# EAGLE board sensor-board (EAGLE 6.4)
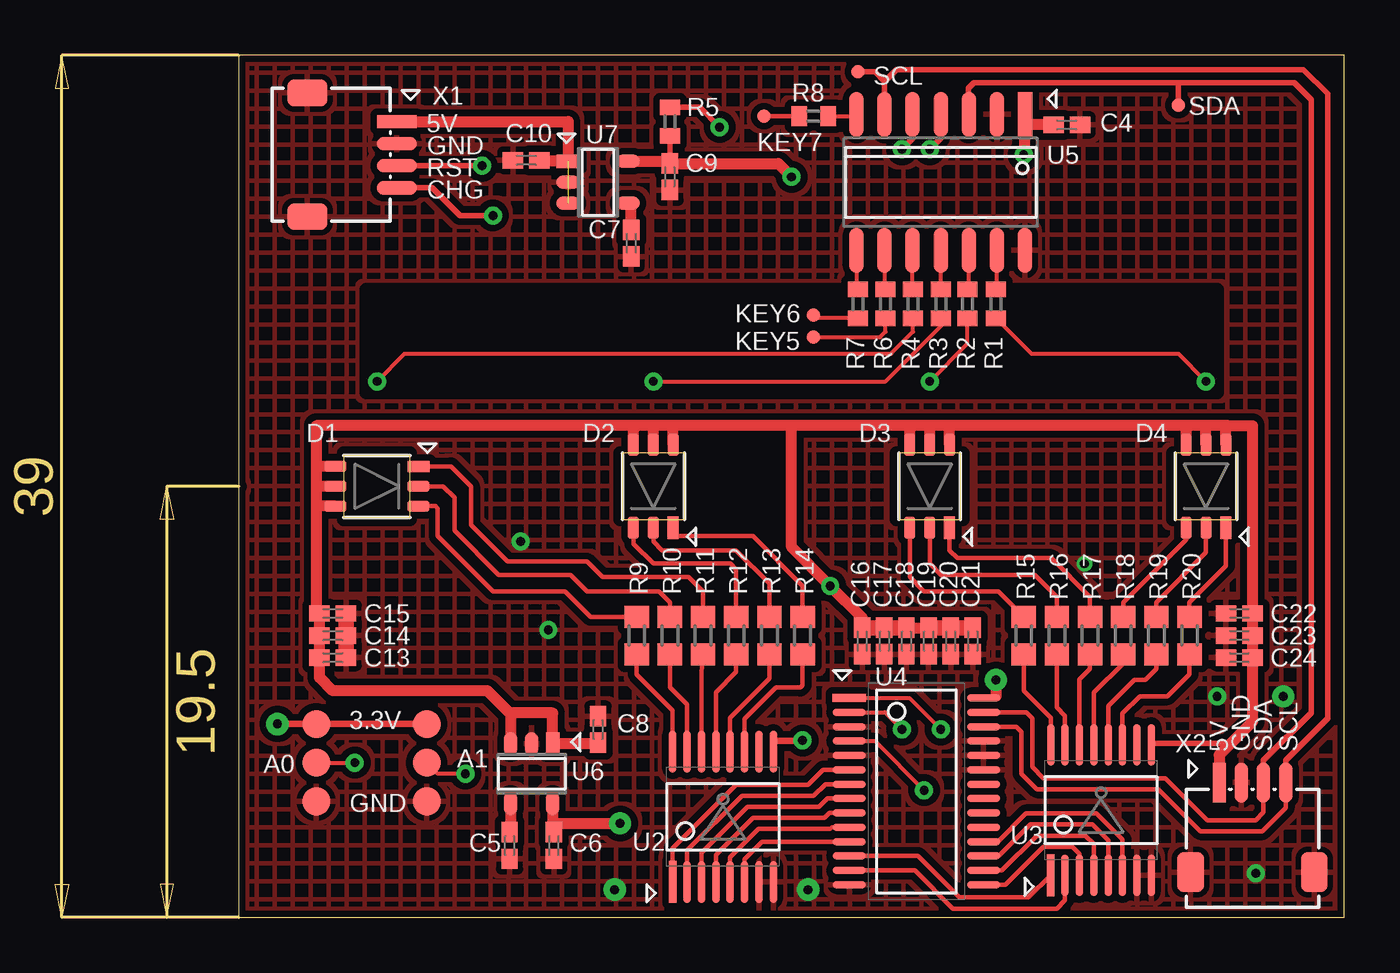
[diagram p0: board, top side]
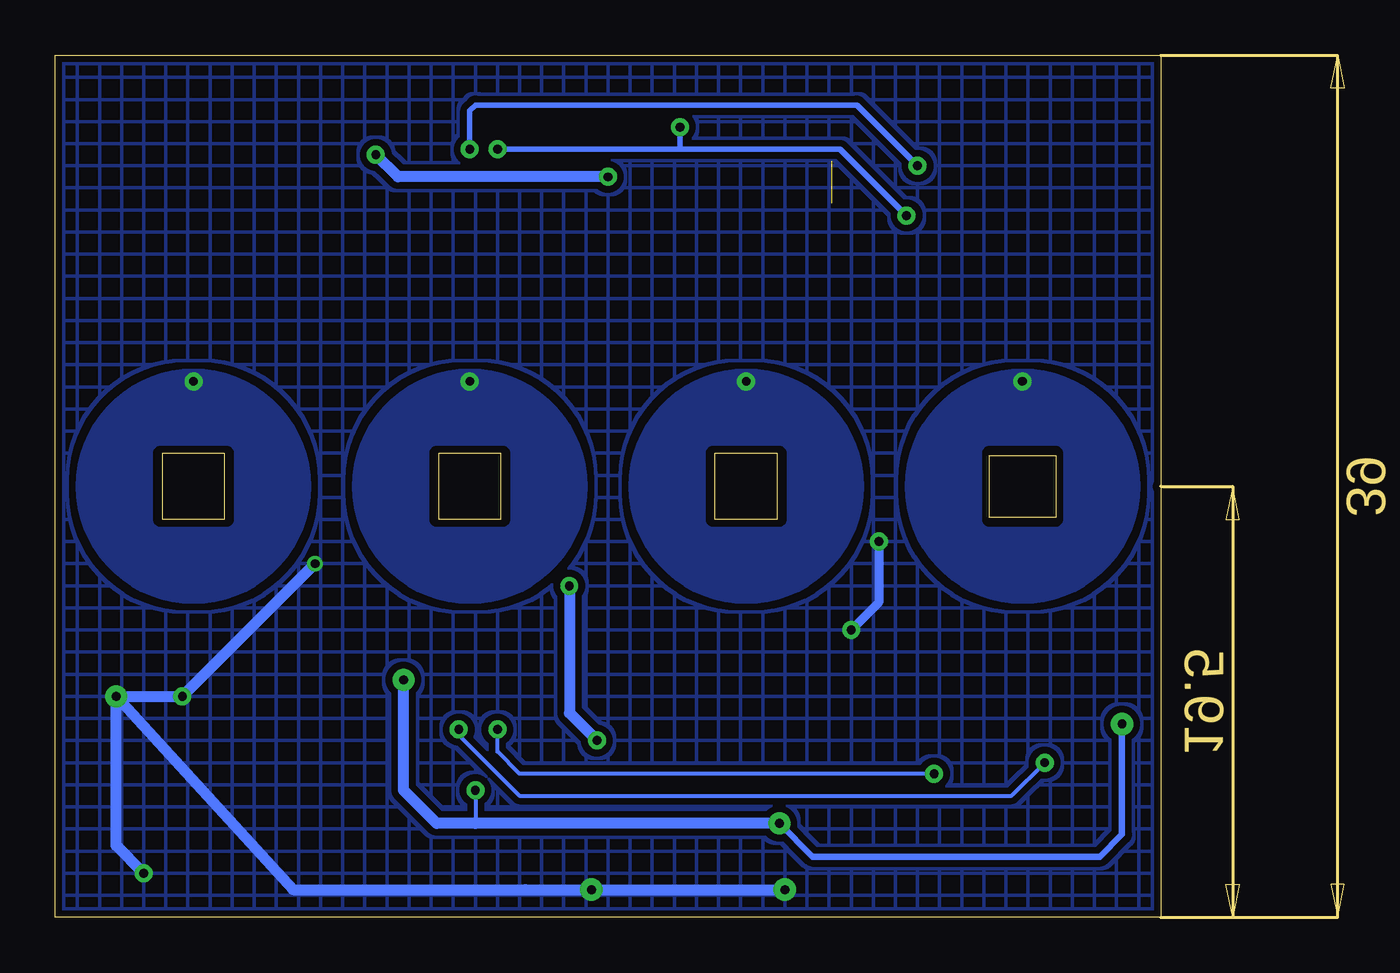
[diagram p1: board, bottom side, seen from below]

Size 50 x 39 mm. Coordinates in mm from the lower left corner, seen from the top.
Outline: 0,0 50,0 50,39 0,39 0,0
Copper layers (1*16): Top 0.035mm / dielectric 1.5mm / Bottom 0.035mm
Design rules "Fusion_eagle_rule_v1.1 *": minimum track width 6mil, minimum drill 12mil, track to track 6mil, track to pad 6mil, pad to pad 6mil, via to via 6mil, smd to smd 0mil, copper to edge 10mil, drill to drill 10mil, minimum pad ring 10mil, minimum via ring 6mil, stop-mask expansion 2mil, vias tented up to drill 100mil, thermal gap 10mil
tRestrict: area 4.8,18 to 7.8,21; area 17.2,18 to 20.2,21; area 29.8,18 to 32.8,21; area 42.2,18 to 45.2,21; area 5.8,23.8 to 44.2,28.4

## Footprints (pad centres in the part's own frame; a part is rotated, then mirrored left to right if it is on the bottom)
B1,27 = smd 1.27 x 1.27: TP 0,0
C0402K = smd 0.925 x 0.74: 1 -0.6,0; 2 0.6,0
ASMT-YTC2-0AA02-REV = smd 1 x 0.5: 1 -1.875,-0.9; 2 -1.875,0; 3 -1.875,0.9; 4 1.875,0.9; 5 1.875,0; 6 1.875,-0.9
TP06R = smd 0.6 x 0.6: TP 0,0
R0402 = smd 0.7 x 0.9: 1 -0.65,0; 2 0.65,0
R0603 = smd 1 x 1.1: 1 -0.85,0; 2 0.85,0
TSSOP-PW-R-PDSO-G16 = smd 1.9 x 0.35: 1 -2.95,2.275; 2 -2.95,1.625; 3 -2.95,0.975; 4 -2.95,0.325; 5 -2.95,-0.325; 6 -2.95,-0.975; 7 -2.95,-1.625; 8 -2.95,-2.275; 9 2.95,-2.275; 10 2.95,-1.625; 11 2.95,-0.975; 12 2.95,-0.325; 13 2.95,0.325; 14 2.95,0.975; 15 2.95,1.625; 16 2.95,2.275
SOT361-1 = smd 1.5 x 0.35: 1 -3.038,4.225; 2 -3.038,3.575; 3 -3.038,2.925; 4 -3.038,2.275; 5 -3.038,1.625; 6 -3.038,0.975; 7 -3.038,0.325; 8 -3.038,-0.325; 9 -3.038,-0.975; 10 -3.038,-1.625; 11 -3.038,-2.275; 12 -3.038,-2.925; 13 -3.038,-3.575; 14 -3.038,-4.225; 15 3.038,-4.225; 16 3.038,-3.575; 17 3.038,-2.925; 18 3.038,-2.275; 19 3.038,-1.625; 20 3.038,-0.975; 21 3.038,-0.325; 22 3.038,0.325; 23 3.038,0.975; 24 3.038,1.625; 25 3.038,2.275; 26 3.038,2.925; 27 3.038,3.575; 28 3.038,4.225
SO14 = smd 0.66 x 2.032: 1 -3.81,-3.073; 2 -2.54,-3.073; 3 -1.27,-3.073; 4 0,-3.073; 5 1.27,-3.073; 6 2.54,-3.073; 7 3.81,-3.073; 8 3.81,3.073; 9 2.54,3.073; 10 1.27,3.073; 11 0,3.073; 12 -1.27,3.073; 13 -2.54,3.073; 14 -3.81,3.073
SOT23-5 = smd 0.6 x 1.05: 1 -0.95,-1.35; 2 0,-1.35; 3 0.95,-1.35; 4 0.95,1.35; 5 -0.95,1.35
MOLEX-501953-0407 = smd 0.6 x 1.8: 1 -1.5,5.65; 2 -0.5,5.65; 3 0.5,5.65; 4 1.5,5.65 | smd 1.2 x 1.8: 5 -2.8,1.6; 6 2.8,1.6

## Placement (x,y rotation side)
3.3V  TPB1,27  [B1,27]  8.5,8.75 90 top
A0  TPB1,27  [B1,27]  3.5,7 90 top
A1  TPB1,27  [B1,27]  8.5,7 90 top
C4  0.1uF 100V  [C0402K]  37.45,35.85 0 top
C5  0.01uF 25V  [C0402K]  12.25,3.25 270 top
C6  2.2uF 10V  [C0402K]  14.25,3.25 90 top
C7  0.01uF 25V  [C0402K]  17.75,30.5 270 top
C8  1uF 25V  [C0402K]  16.25,8.5 90 top
C9  2.2uF 10V  [C0402K]  19.5,33.5 270 top
C10  1uF 25V  [C0402K]  13,34.25 0 top
C13  0.01uF 25V  [C0402K]  4.25,11.75 180 top
C14  0.01uF 16V  [C0402K]  4.25,12.75 180 top
C15  0.01uF 16V  [C0402K]  4.25,13.75 180 top
C16  0.01uF 16V  [C0402K]  28.2,12.5 90 top
C17  0.01uF 16V  [C0402K]  29.2,12.5 90 top
C18  0.01uF 16V  [C0402K]  30.2,12.5 90 top
C19  0.01uF 16V  [C0402K]  31.2,12.5 90 top
C20  0.01uF 16V  [C0402K]  32.2,12.5 90 top
C21  0.01uF 16V  [C0402K]  33.2,12.5 90 top
C22  0.01uF 16V  [C0402K]  45.25,13.75 0 top
C23  0.01uF 16V  [C0402K]  45.25,12.75 0 top
C24  0.01uF 16V  [C0402K]  45.25,11.75 0 top
D1  ASMT-YTC2-0AA02  [ASMT-YTC2-0AA02-REV]  6.25,19.5 180 top
D2  ASMT-YTC2-0AA02  [ASMT-YTC2-0AA02-REV]  18.75,19.5 90 top
D3  ASMT-YTC2-0AA02  [ASMT-YTC2-0AA02-REV]  31.25,19.5 90 top
D4  ASMT-YTC2-0AA02  [ASMT-YTC2-0AA02-REV]  43.75,19.5 90 top
GND  TPB1,27  [B1,27]  8.5,5.25 90 top
KEY5  TPTP06R  [TP06R]  26,26.25 0 top
KEY6  TPTP06R  [TP06R]  26,27.25 0 top
KEY7  TPTP06R  [TP06R]  23.75,36.25 270 top
R1  4.7k  [R0402]  34.25,27.75 270 top
R2  4.7k  [R0402]  32.95,27.75 270 top
R3  4.7k  [R0402]  31.75,27.75 270 top
R4  4.7k  [R0402]  30.5,27.75 270 top
R5  47k  [R0402]  19.5,36 270 top
R6  4.7k  [R0402]  29.25,27.75 270 top
R7  4.7k  [R0402]  28,27.75 270 top
R8  4.7k  [R0402]  26,36.25 180 top
R9  60R 145mW  [R0603]  18,12.75 90 top
R10  60R 145mW  [R0603]  19.5,12.75 90 top
R11  60R 145mW  [R0603]  21,12.75 90 top
R12  60R 145mW  [R0603]  22.5,12.75 90 top
R13  60R 145mW  [R0603]  24,12.75 90 top
R14  60R 145mW  [R0603]  25.5,12.75 90 top
R15  60R 145mW  [R0603]  35.5,12.75 90 top
R16  60R 145mW  [R0603]  37,12.75 90 top
R17  60R 145mW  [R0603]  38.5,12.75 90 top
R18  60R 145mW  [R0603]  40,12.75 90 top
R19  60R 145mW  [R0603]  41.5,12.75 90 top
R20  60R 145mW  [R0603]  43,12.75 90 top
SCL  TPTP06R  [TP06R]  28,38.25 0 top
SDA  TPTP06R  [TP06R]  42.5,36.75 180 top
TP1  TPB1,27  [B1,27]  3.5,8.75 90 top
TP3  TPB1,27  [B1,27]  3.5,5.25 90 top
U2  ULN2003LVPWR  [TSSOP-PW-R-PDSO-G16]  21.9,4.55 90 top
U3  ULN2003LVPWR  [TSSOP-PW-R-PDSO-G16]  39,4.85 90 top
U4  PCA9685PW  [SOT361-1]  30.65,5.7 0 top
U5  AT42QT1070-SSU  [SO14]  31.75,33.25 180 top
U6  TPS730XX  [SOT23-5]  13.25,6.5 180 top
U7  TPS730XX  [SOT23-5]  16.25,33.25 270 top
X1  MOLEX-501953-0407  [MOLEX-501953-0407]  1.5,34.5 270 top
X2  MOLEX-501953-0407  [MOLEX-501953-0407]  45.85,0.45 0 top

## Library data of the parts
3.3V A0 A1 GND KEY5-KEY7 SCL SDA TP1 TP3 = testpad
C4 = rcl; ELEMENT14_URL: http://sg.element14.com/jsp/search/productdetail.jsp?sku=1833861; MFR_PART: 0402YC104KAT2A
C5 C7 C13-C24 = rcl; ELEMENT14_URL: http://sg.element14.com/jsp/search/productdetail.jsp?sku=1692285; MFR_PART: C0402C103J3RACTU
C6 = rcl; ELEMENT14_URL: http://sg.element14.com/jsp/search/productdetail.jsp?sku=2118127; MFR_PART: C0402C225M8PAC TU
C8 C10 = rcl; ELEMENT14_URL: http://sg.element14.com/jsp/search/productdetail.jsp?sku=1844112; MFR_PART: C1005X5R1A105K050BB
C9 = rcl; ELEMENT14_URL: http://sg.element14.com/jsp/search/productdetail.jsp?sku=2146156; MFR_PART: C1608X7R1C105K080AC
D1-D4 = led
R1-R4 R6-R8 = myrcl; ELEMENT14_URL: http://sg.element14.com/jsp/search/productdetail.jsp?sku=1768801; MFR_PART: PCF0402PR-4K7BT1
R5 = myrcl; ELEMENT14_URL: http://sg.element14.com/jsp/search/productdetail.jsp?sku=1799288; MFR_PART: RC0402JR-0747KL
R9-R20 = myrcl; ELEMENT14_URL: http://sg.element14.com/jsp/search/productdetail.jsp?sku=1894102; MFR_PART: ERJP03F62R0V
U2-U4 = led_driver
U5 = touch_ctl
U6 U7 = vreg
X1 X2 = connector

## Nets
!CAPSENSE_CHG!: R5.1 U5.5 X1.4
!CAPSENSE_RST!: U5.4 X1.3
GND: C4.2 C5.2 C6.1 C7.2 C8.2 C9.2 C10.1 C13.1 C14.1 C15.1 C16.1 C17.1 C18.1 C19.1 C20.1 C21.1 C22.1 C23.1 C24.1 GND.TP TP3.TP U2.7 U2.8 U3.7 U3.8 U4.3 U4.5 U4.14 U4.23 U4.24 U4.25 U5.2 U5.14 U6.2 U7.2 X1.2 X1.5 X1.6 X2.2 X2.5 X2.6
KEY1: R1.2
KEY2: R2.2
KEY3: R3.2
KEY4: R4.2
KEY5: KEY5.TP R6.2
KEY6: KEY6.TP R7.2
KEY7: KEY7.TP R8.2
LEDOUT_A1: U2.1 U4.6
LEDOUT_A2: U2.2 U4.7
LEDOUT_A3: U2.3 U4.8
LEDOUT_A4: U2.4 U4.9
LEDOUT_A5: U2.5 U4.10
LEDOUT_A6: U2.6 U4.11
LEDOUT_B1: U3.1 U4.12
LEDOUT_B2: U3.2 U4.13
LEDOUT_B3: U3.3 U4.15
LEDOUT_B4: U3.4 U4.16
LEDOUT_B5: U3.5 U4.17
LEDOUT_B6: U3.6 U4.18
N$1: C5.1 U6.4
N$6: A0.TP U4.1
N$7: A1.TP U4.2
N$8: C7.1 U7.4
N$10: R6.1 U5.9
N$11: R7.1 U5.8
N$12: R8.1 U5.7
N$15: R1.1 U5.13
N$16: R2.1 U5.12
N$17: R3.1 U5.11
N$18: R4.1 U5.10
N$31: D4.1 R20.2
N$32: D1.1 R11.2
N$33: D1.2 R10.2
N$34: D3.3 R15.2
N$35: D2.3 R12.2
N$36: D2.2 R13.2
N$37: R15.1 U3.16
N$38: R16.1 U3.15
N$39: D3.1 R17.2
N$40: D3.2 R16.2
N$41: D4.3 R18.2
N$42: D4.2 R19.2
N$55: R17.1 U3.14
N$56: R18.1 U3.13
N$57: R19.1 U3.12
N$58: R20.1 U3.11
N$59: D2.1 R14.2
N$60: D1.3 R9.2
N$61: R9.1 U2.16
N$62: R10.1 U2.15
N$63: R11.1 U2.14
N$64: R12.1 U2.13
N$65: R13.1 U2.12
N$66: R14.1 U2.11
SCL: SCL.TP U4.26 U5.6 X2.4
SDA: SDA.TP U4.27 U5.3 X2.3
VDD_3_3_CAPSENSE: C4.1 C9.1 R5.2 U5.1 U7.5
VDD_3_3_PWMDRIVE: 3.3V.TP C6.2 TP1.TP U4.4 U4.28 U6.5
VDD_5_CAPSENSE: C10.2 U7.1 U7.3 X1.1
VDD_5_ILLUM: C8.1 C13.2 C14.2 C15.2 C16.2 C17.2 C18.2 C19.2 C20.2 C21.2 C22.2 C23.2 C24.2 D1.4 D1.5 D1.6 D2.4 D2.5 D2.6 D3.4 D3.5 D3.6 D4.4 D4.5 D4.6 U2.9 U3.9 U6.1 U6.3 X2.1

## Tracks (layer width: path | path; a pad name or v marks a point on that pad's centre or on a via)
!CAPSENSE_CHG!  (via drill 0.4 pad 0.81)
  Top 0.25: X1.4 8.75,33 10,31.75 v11.5,31.75 | U5.5 30.48,35.23 v30,34.75 | R5.1 20.85,36.65 v21.75,35.75
  Bottom 0.25: v30,34.75 21.75,34.75 | 21.75,34.75 14.5,34.75 v11.5,31.75 | v21.75,35.75 21.75,34.75
!CAPSENSE_RST!  (via drill 0.4 pad 0.81)
  Top 0.25: U5.4 31.75,35.25 v31.25,34.75 | v11,34 X1.3
  Bottom 0.25: v31.25,34.75 31.25,36.5 31,36.75 13.75,36.75 v11,34
GND  (via drill 0.4, 0.4 pad 0.81, 0.4 pad 1, 0.4 pad 1.02)
  Top 0.7: C13.1 C14.1 C15.1
  Bottom 0.406: v12.75,17 12.75,14.25 v14,13
  Bottom 0.5: 28.75,1.25 v25.75,1.25 | v25.75,1.25 v17,1.25 | v47.25,10 39.25,1.25 v25.75,1.25 | v47.25,10 v44.25,10 v38.25,16 | v46,2 47.25,3.25 v47.25,10
  pour Top (isolate 0.305, hatched): 0,39 0,0 50,0 50,39
  pour Bottom (isolate 0.305, rank 3, hatched): 0,39 50,39 50,0 0,0
KEY1  (via drill 0.4 pad 0.81)
  Top 0.17: v43.75,24.25 42.5,25.5 35.85,25.5 R1.2
  pour Bottom: 38.5,19.5 arc-90 43.75,24.75 arc-90 49,19.5 arc-90 43.75,14.25 arc-90
KEY2  (via drill 0.4 pad 0.81)
  Top 0.17: v31.25,24.25 32.95,25.95 R2.2
  pour Bottom: 26,19.5 arc-90 31.25,24.75 arc-90 36.5,19.5 arc-90 31.25,14.25 arc-90
KEY3  (via drill 0.4 pad 0.81)
  Top 0.17: v18.75,24.25 29.25,24.25 31.75,26.75 R3.2
  pour Bottom: 13.5,19.5 arc-90 18.75,24.75 arc-90 24,19.5 arc-90 18.75,14.25 arc-90
KEY4  (via drill 0.4 pad 0.81)
  Top 0.17: v6.25,24.25 7.5,25.5 29.5,25.5 30.5,26.5 R4.2
  pour Bottom: 1,19.5 arc-90 6.25,24.75 arc-90 11.5,19.5 arc-90 6.25,14.25 arc-90
KEY5
  Top 0.17: KEY5.TP 29,26.25 29.25,26.5 R6.2
KEY6
  Top 0.17: R7.2 26.15,27.1 KEY6.TP
KEY7
  Top 0.2: R8.2 KEY7.TP
LEDOUT_A1
  Top 0.2: U4.6 26.43,6.67 25.75,6 22.5,6 19.62,3.12 U2.1
LEDOUT_A2
  Top 0.2: U4.7 26.52,6.03 26,5.5 22.75,5.5 20.27,3.02 U2.2
LEDOUT_A3
  Top 0.2: U4.8 26.62,5.38 26.25,5 23,5 20.93,2.92 U2.3
LEDOUT_A4
  Top 0.2: U4.9 26.73,4.72 26.5,4.5 23.25,4.5 21.57,2.83 U2.4
LEDOUT_A5
  Top 0.2: U4.10 26.82,4.08 26.75,4 23.5,4 22.23,2.73 U2.5
LEDOUT_A6
  Top 0.2: U2.6 22.88,2.62 23.68,3.42 U4.11
LEDOUT_B1
  Top 0.2: U4.12 30.73,2.77 32.6,0.9 35.73,0.9 U3.1
LEDOUT_B2
  Top 0.2: U4.13 30.57,2.12 32.3,0.4 37,0.4 37.38,0.78 U3.2
LEDOUT_B3
  Top 0.2: U4.15 34.67,1.48 36.4,3.2 37.7,3.2 38.02,2.88 U3.3
LEDOUT_B4
  Top 0.2: U4.16 34.52,2.12 36.1,3.7 38.3,3.7 38.67,3.33 U3.4
LEDOUT_B5
  Top 0.2: U4.17 34.38,2.77 35.8,4.2 38.6,4.2 39.33,3.48 U3.5
LEDOUT_B6
  Top 0.2: U4.18 34.33,3.42 35.6,4.7 38.8,4.7 39.98,3.52 U3.6
N$1
  Top 0.5: U6.4 12.3,3.9 C5.1
N$2
  cutout Bottom: 4.75,17.75 7.75,17.75 arc90 8,18 8,21 arc90 7.75,21.25 4.75,21.25 arc90 4.5,21 4.5,18 arc90
N$3
  cutout Bottom: 17.25,21.25 20.25,21.25 arc-90 20.5,21 20.5,18 arc-90 20.25,17.75 17.25,17.75 arc-90 17,18 17,21 arc-90
N$4
  cutout Bottom: 29.75,21.25 32.75,21.25 arc-90 33,21 33,18 arc-90 32.75,17.75 29.75,17.75 arc-90 29.5,18 29.5,21 arc-90
N$5
  cutout Bottom: 42.25,17.75 45.25,17.75 arc90 45.5,18 45.5,21 arc90 45.25,21.25 42.25,21.25 arc90 42,21 42,18 arc90
N$6  (via drill 0.4 pad 0.81)
  Top 0.17: A0.TP v5.25,7 | U4.1 30.32,9.93 v31.75,8.5
  Bottom 0.17: v5.25,7 6.75,5.5 29,5.5 31.75,8.25 v31.75,8.5
N$7  (via drill 0.4 pad 0.81)
  Top 0.17: U4.2 29.23,9.28 v30,8.5 | v10.25,6.5 9,6.5 A1.TP
  Bottom 0.17: v10.25,6.5 29,6.5 30,7.5 v30,8.5
N$8
  Top 0.5: C7.1 17.75,32.15 U7.4
N$10
  Top 0.17: U5.9 29.21,28.44 R6.1
N$11
  Top 0.17: U5.8 27.94,28.46 R7.1
N$12
  Top 0.17: R8.1 27.87,36.25 U5.7
N$15
  Top 0.17: R1.1 34.29,28.44 U5.13
N$16
  Top 0.17: R2.1 33.02,28.47 U5.12
N$17
  Top 0.17: R3.1 U5.11
N$18
  Top 0.17: R4.1 30.48,28.42 U5.10
N$31
  Top 0.2: D4.1 44.65,15.9 43,14.25 R20.2
N$32
  Top 0.2: D1.1 9.6,20.4 10.5,19.5 10.5,17.75 12.15,16.1 15.75,16.1 16.45,15.4 20.35,15.4 21,14.75 R11.2
N$33
  Top 0.2: R10.2 19.5,14.25 19,14.75 15.75,14.75 15,15.5 11.75,15.5 9.75,17.5 9.75,19 9.25,19.5 D1.2
N$34
  Top 0.2: R15.2 34.35,14.75 31,14.75 30.35,15.4 D3.3
N$35
  Top 0.2: R12.2 22.5,15.75 22.25,16 18.75,16 17.85,16.9 D2.3
N$36
  Top 0.2: R13.2 24,15.1 22.5,16.6 19.15,16.6 18.75,17 D2.2
N$37
  Top 0.2: R15.1 35.5,10.25 36.73,9.03 U3.16
N$38
  Top 0.2: U3.15 37.38,9.12 37,9.5 R16.1
N$39
  Top 0.2: R17.2 38.5,14.5 36.75,16.25 32.5,16.25 32.15,16.6 D3.1
N$40
  Top 0.2: R16.2 37,14.5 36,15.5 31.75,15.5 31.25,16 D3.2
N$41
  Top 0.2: D4.3 42.85,17.1 40,14.25 R18.2
N$42
  Top 0.2: D4.2 43.75,16.5 41.5,14.25 R19.2
N$55
  Top 0.2: U3.14 38.02,10.78 38.5,11.25 R17.1
N$56
  Top 0.2: U3.13 38.67,10.18 40,11.5 R18.1
N$57
  Top 0.2: U3.12 39.33,9.57 40.5,10.75 41,10.75 41.5,11.25 R19.1
N$58
  Top 0.2: U3.11 39.98,9.22 40.75,10 42,10 43,11 R20.1
N$59
  Top 0.2: R14.2 25.5,15 23.25,17.25 19.65,17.25 D2.1
N$60
  Top 0.2: R9.2 15.9,13.6 14.75,14.75 11.5,14.75 9,17.25 9,18.5 8.9,18.6 D1.3
N$61
  Top 0.2: U2.16 19.62,9.38 18,11 R9.1
N$62
  Top 0.2: U2.15 20.27,9.62 19.5,10.4 R10.1
N$63
  Top 0.2: U2.14 20.93,11.07 R11.1
N$64
  Top 0.2: U2.13 21.57,10.18 22.5,11.1 R12.1
N$65
  Top 0.2: U2.12 22.23,9.03 24,10.8 R13.1
N$66
  Top 0.2: U2.11 22.88,8.97 24.3,10.4 25.4,10.4 25.5,10.5 R14.1
SCL
  Top 0.2: U4.26 35.17,8.62 35.4,8.4 35.4,6.5 36.1,5.8 41.6,5.8 43.5,3.9 46.3,3.9 47.35,4.95 X2.4
  Top 0.25: X2.4 47.35,7.1 49.25,9 49.25,37.25 48.15,38.35 29.75,38.35 29.21,37.81 | U5.6 29.21,37.81 | SCL.TP 28.77,38.25 29.21,37.81
SDA
  Top 0.17: U5.3 33,36.34
  Top 0.2: U4.27 35.62,9.28 35.9,9 35.9,6.8 36.4,6.3 41.9,6.3 43.8,4.4 46,4.4 46.35,4.75 X2.3
  Top 0.25: 33,36.34 33,37.5 33.25,37.75 42.5,37.75 | 42.5,37.75 47.75,37.75 48.5,37 48.5,9.25 46.35,7.1 X2.3 | SDA.TP 42.5,37.75
VDD_3_3_CAPSENSE  (via drill 0.4 pad 0.81)
  Top 0.25: R5.2 C9.1
  Top 0.5: U7.5 19.4,34.2 C9.1 24.4,34.1 v25,33.5 | v35.5,34.5 35.56,34.56 U5.1 35.56,35.85 C4.1
  Bottom 0.5: v25,33.5 34.5,33.5 v35.5,34.5
VDD_3_3_PWMDRIVE  (via drill 0.4 pad 0.81, 0.4 pad 1, 0.4 pad 1.02)
  Top 0.17: U4.4 28.77,7.97 v31,5.75
  Top 0.3: 34.25,10 34.17,9.93 U4.28 | v1.75,8.75 TP1.TP 3.3V.TP
  Top 0.5: U6.5 14.2,4.25 | 14.2,4.25 v17.25,4.25 | v34.25,10.75 34.25,10 | 14.2,4.25 14.2,3.9 C6.2
  Bottom 0.17: 30.5,4.25 31,4.25 v31,5.75
  Bottom 0.3: v17.25,4.25 15.75,2.75 2.75,2.75 1.75,3.75 v1.75,8.75
  Bottom 0.5: v17.25,4.25 31,4.25 32.75,4.25 34.25,5.75 v34.25,10.75
VDD_5_CAPSENSE  (1 unrouted)
  Top 0.5: X1.1 14.9,36 U7.1 13.6,34.2 C10.2
VDD_5_ILLUM  (via drill 0.4 pad 0.81)
  Top 0.2: 24.18,7.97 U2.9
  Top 0.25: U3.9 41.27,7.88 44.88,7.88
  Top 0.3: 24.18,7.97 25.48,7.97 v25.5,8
  Top 0.5: 4.15,20.4 D1.6 3.65,20.4 arc90 3.5,20.25 | C18.2 C19.2 | 44.75,22.25 43.75,22.25 | 43.75,22.25 43,22.25 | 43,22.25 32.25,22.25 | 32.25,22.25 31.25,22.25 | 31.25,22.25 30.5,22.25 | 30.5,22.25 25,22.25 | 25,22.25 19.75,22.25 | 19.75,22.25 18.75,22.25 | 18.75,22.25 18,22.25 | 18,22.25 3.5,22.25 3.5,20.25 | D3.4 30.35,22.1 30.5,22.25 | D3.5 31.25,22.25 | D3.6 32.15,22.15 32.25,22.25 | D4.4 42.85,22.1 43,22.25 | D4.6 44.65,22.15 44.75,22.25 | D4.5 43.75,22.25 | D2.6 19.65,22.15 19.75,22.25 | D2.4 17.85,22.1 18,22.25 | D2.5 18.75,22.25 | 3.5,20.25 3.5,19.5 | 3.5,19.5 3.5,18.6 | D1.5 3.5,19.5 | D1.4 3.5,18.6 | C16.2 28.2,13.55 v26.75,15 25,16.75 25,22.25 | 12.3,9.25 U6.3 | 12.3,9.25 14.2,9.25 U6.1 16.25,7.85 C8.1 | 44.75,22.25 45.85,22.25 C22.2 C23.2 C24.2 45.85,8.85 44.88,7.88 44.35,7.35 X2.1 | 12.3,9.25 12.25,9.25 11.25,10.25 4.25,10.25 3.65,10.85 C13.2 C14.2 3.5,12.75 3.65,12.9 C15.2 3.5,13.75 3.5,18.6
  Top 0.7: C16.2 C17.2 C18.2 | C21.2 C20.2 C19.2
  Bottom 0.5: v26.75,15 26.75,9.25 v25.5,8

## Text on the board
tPlace: 5V | GND | RST | CHG | 5V | GND | SDA | SCL